# EAGLE board SCREW (EAGLE 7.6.0)
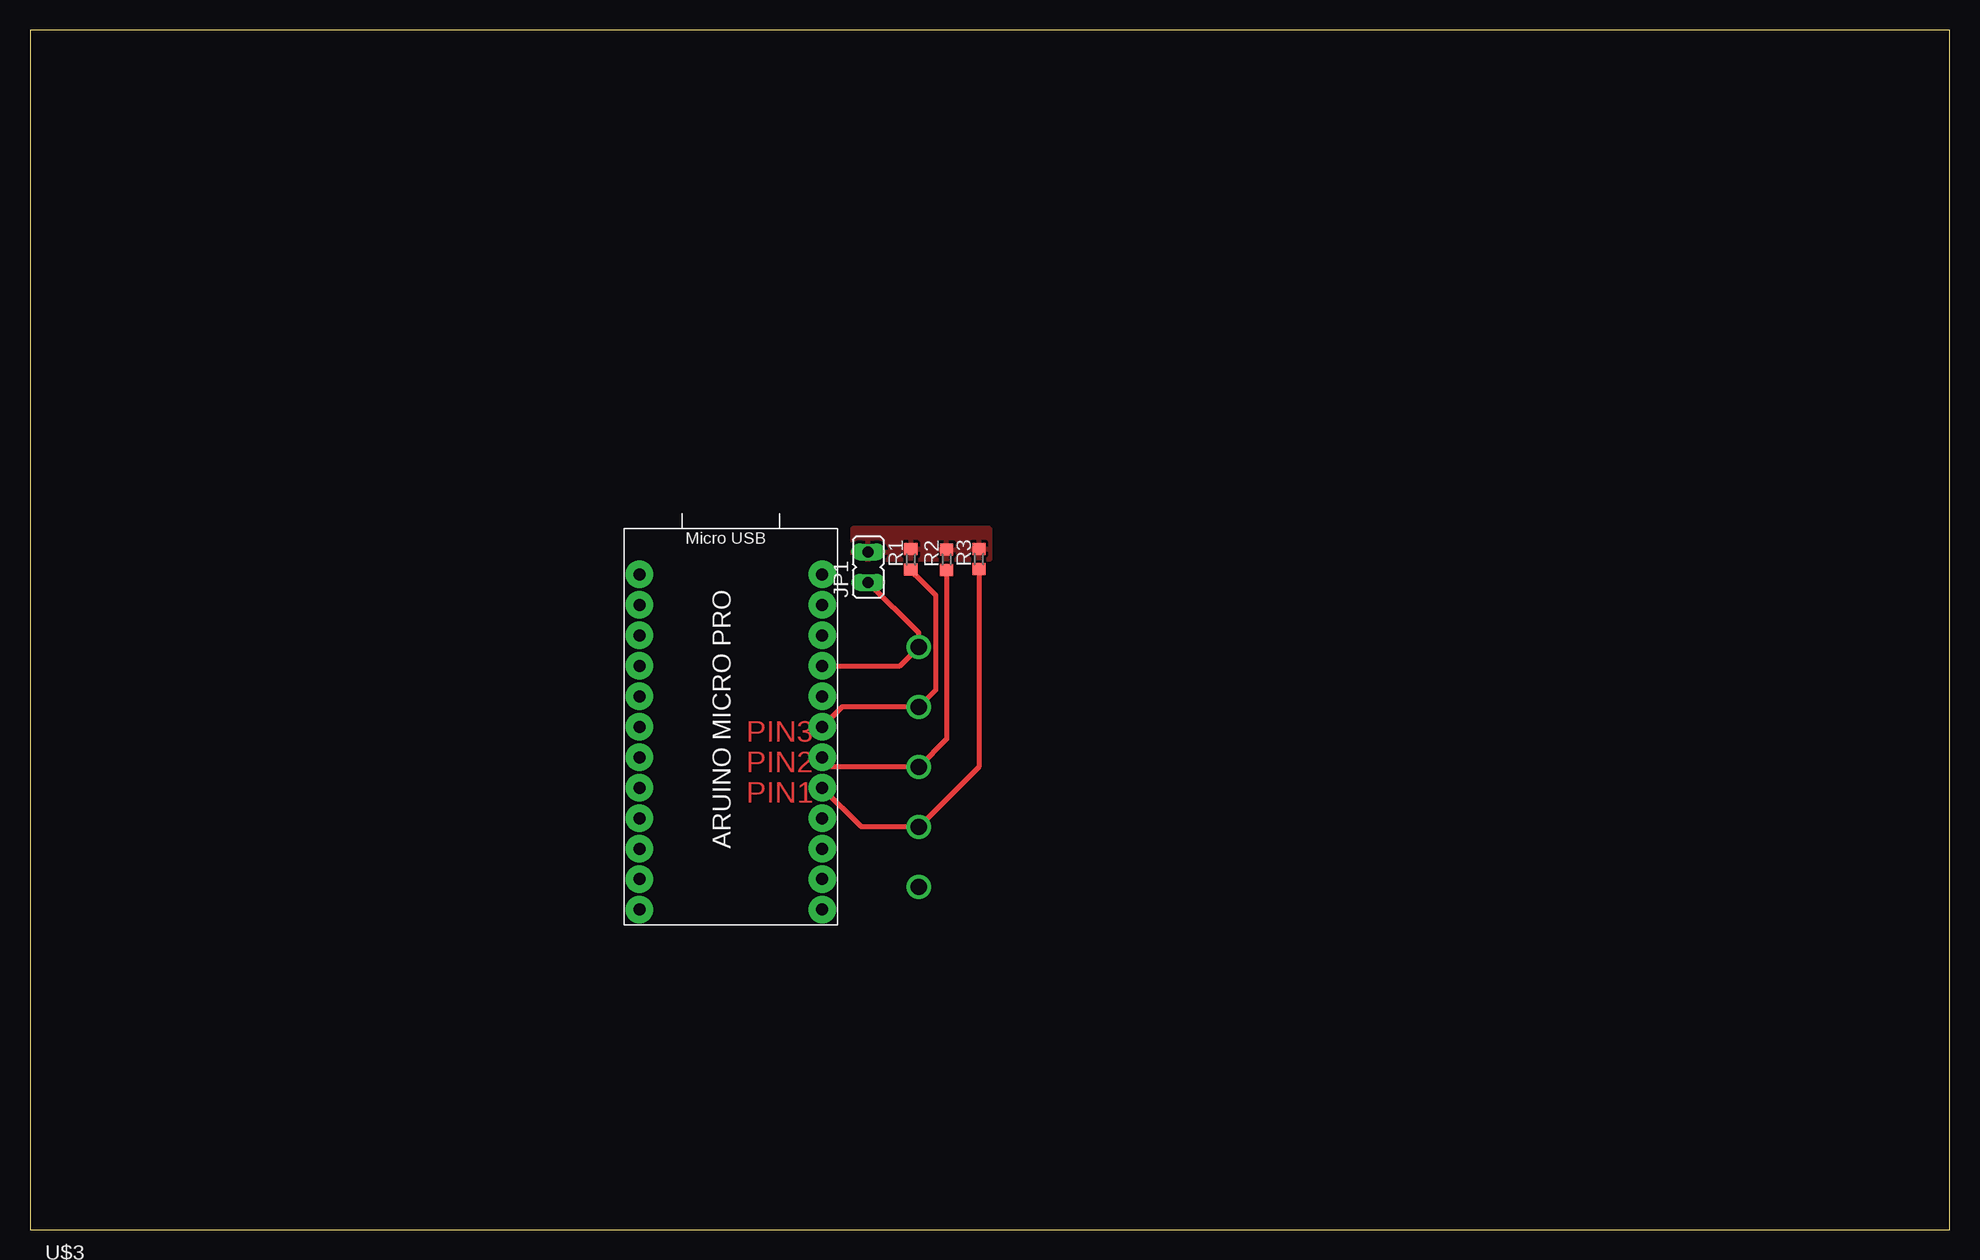
[diagram p0: board, top side]
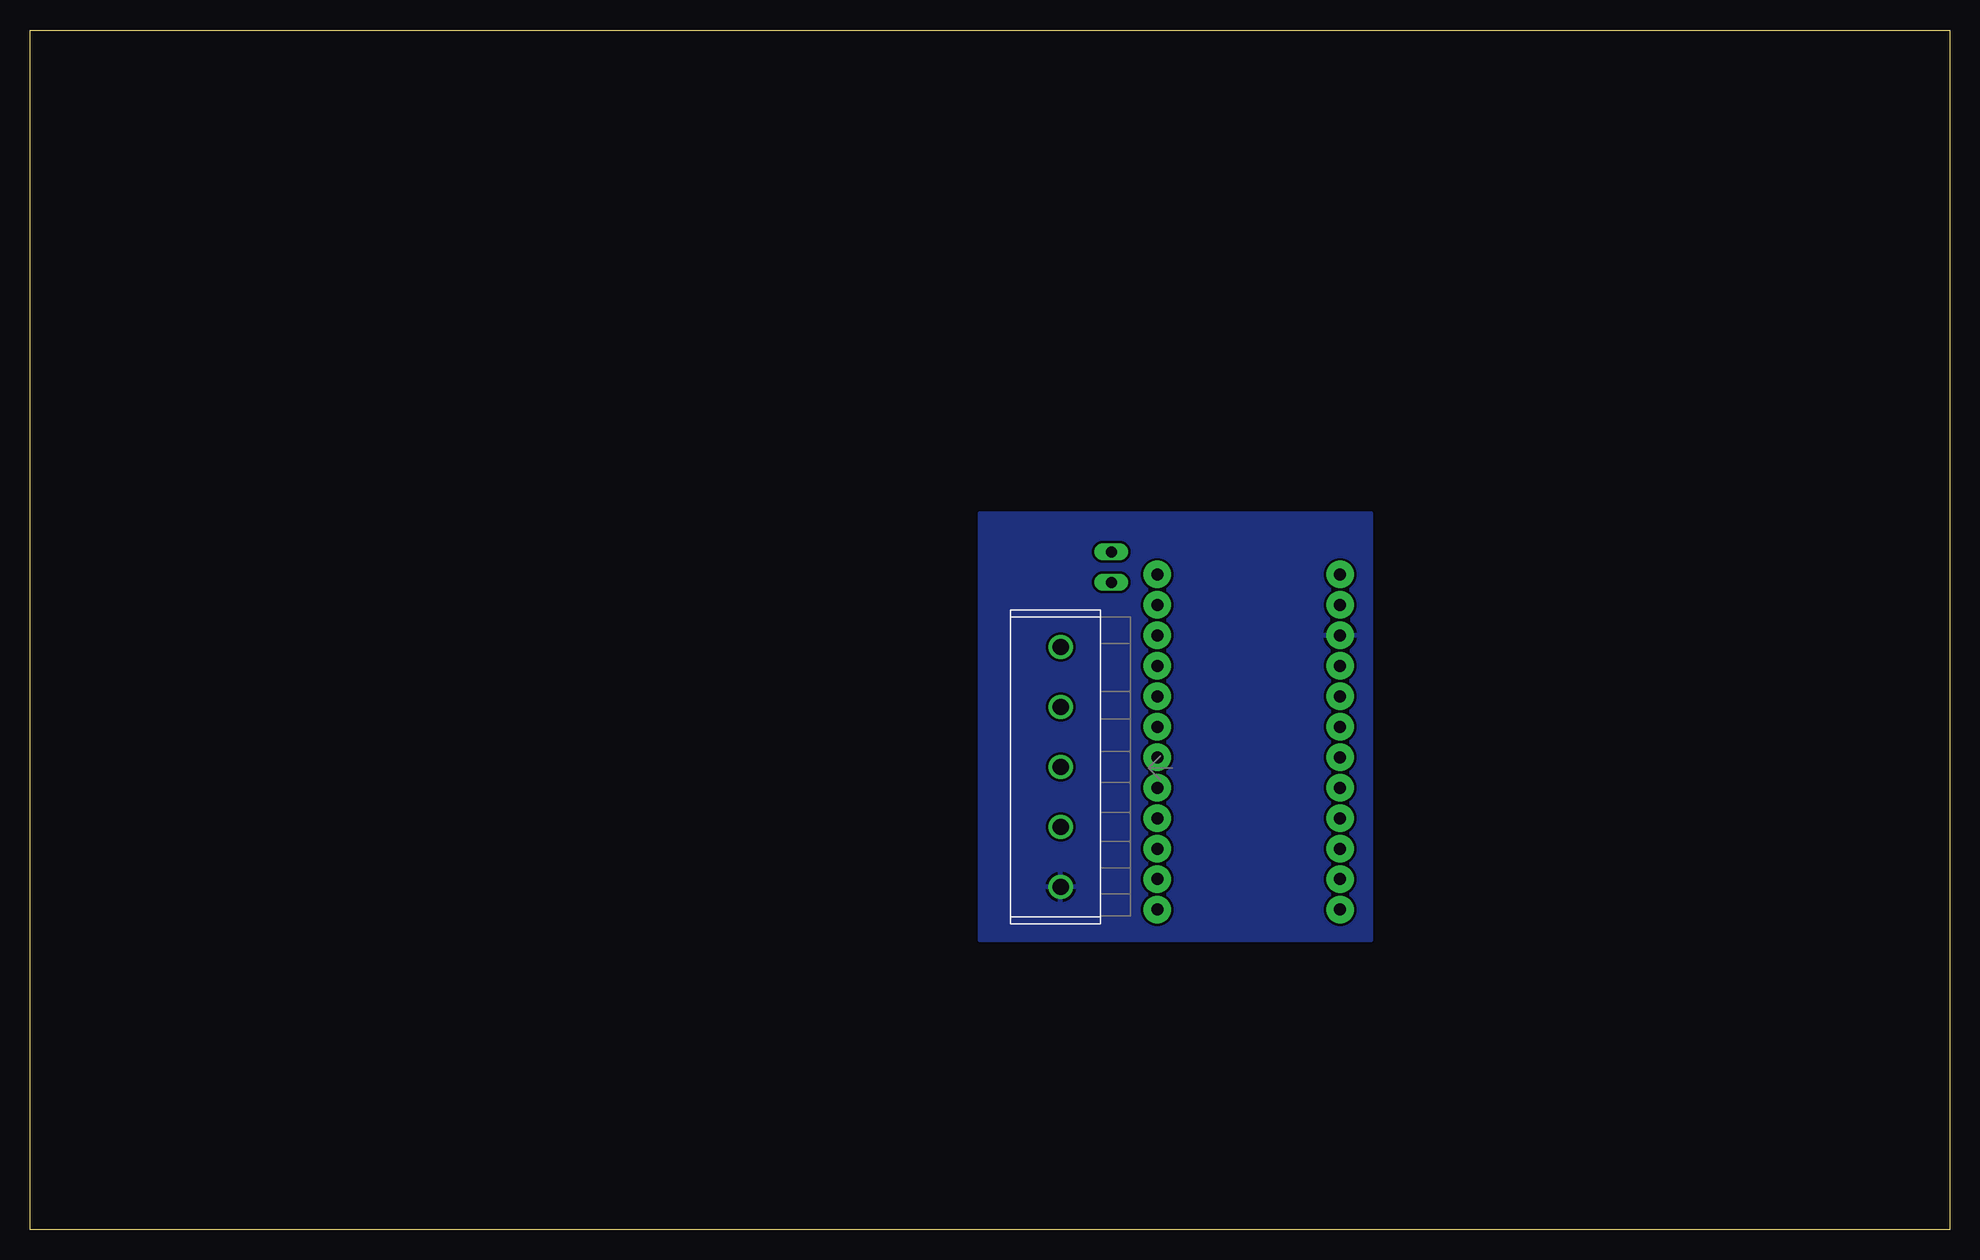
[diagram p1: board, bottom side, seen from below]

Size 160 x 100 mm. Coordinates in mm from the lower left corner, seen from the top.
Outline: 0,0 160,0 160,100 0,100 0,0
Copper layers (1*16): Top 0.035mm / dielectric 1.5mm / Bottom 0.035mm
Design rules "default": minimum track width 10mil, minimum drill 24mil, track to track 8mil, track to pad 8mil, pad to pad 8mil, via to via 8mil, smd to smd 8mil, copper to edge 40mil, drill to drill 8mil, minimum pad ring 10mil, minimum via ring 8mil, stop-mask expansion 4mil, vias tented up to drill 0mil, thermal gap 10mil

## Footprints (pad centres in the part's own frame; a part is rotated, then mirrored left to right if it is on the bottom)
JP1 = drill 0.914 long: 1 0,-1.27; 2 0,1.27
R0603 = smd 1 x 1.1: 1 -0.85,0; 2 0.85,0
ARDUINO_PRO_MICRO = drill 1 pad 2.286: 2 1.27,19.05; 3 1.27,16.51; 4 1.27,13.97; 5 1.27,11.43; 6 1.27,8.89; 7 1.27,6.35; 8 1.27,3.81; 9 1.27,1.27; 10 16.51,1.27; 14 16.51,6.35; 15 16.51,8.89; 16 16.51,3.81; A0 16.51,11.43; A1 16.51,13.97; A2 16.51,16.51; A3 16.51,19.05; GND@0 1.27,24.13; GND@1 1.27,21.59; GND@2 16.51,26.67; RAW 16.51,29.21; RST 16.51,24.13; RXI 1.27,26.67; TXO 1.27,29.21; VCC 16.51,21.59
5PIN_SCREW = drill 1.35: P$1 3.1,3.3; P$2 8.1,3.3; P$3 13.1,3.3; P$4 18.1,3.3; P$5 23.1,3.3
POGO_PIN_394 = drill 1.016 pad 1.524: POGO_PIN 0,0

## Placement (x,y rotation side)
JP1  [JP1]  69.87,55.22 0 top
R1  [R0603]  73.42,55.87 90 top
R2  [R0603]  76.4,55.85 90 top
R3  [R0603]  79.09,55.9 90 top
U$1  ARDUINO_PRO_MICRO  [ARDUINO_PRO_MICRO]  49.53,25.4 0 top
U$2  5PIN_SCREW  [5PIN_SCREW]  70.78,25.46 90 bottom
U$3  [POGO_PIN_394]  2.54,-3.81 0 top  (outside the outline)

## Library data of the parts
JP1 = jumper
R1-R3 = resistor
U$1 U$2 = pie
U$3 = pie; PIE-INT-REF-NUM: POGO-PIN

## Nets
5V: JP1.2 R1.2 R2.2 R3.2
GND: U$1.GND@0 U$2.P$1
PIN1: R3.1 U$1.A0 U$2.P$2
PIN2: R2.1 U$1.A1 U$2.P$3
PIN3: R1.1 U$1.A2 U$2.P$4
VCC: JP1.1 U$1.VCC U$2.P$5

## Tracks (layer width: path | path; a pad name or v marks a point on that pad's centre or on a via)
5V
  pour Top: 68.58,55.88 80.01,55.88 80.01,58.42 68.58,58.42
GND
  pour Bottom: 48.26,59.69 48.26,24.13 80.77,24.13 80.77,59.69
PIN1
  Top 0.406: U$1.A0 69.31,33.56 U$2.P$2 79.09,38.57 R3.1
PIN2
  Top 0.406: U$1.A1 66.85,38.56 U$2.P$3 76.4,40.88 R2.1
PIN3
  Top 0.406: U$1.A2 67.69,43.56 U$2.P$4 75.49,44.97 75.49,52.9 73.78,54.61 73.66,54.61 73.66,54.78 R1.1
VCC
  Top 0.406: U$1.VCC 72.51,46.99 U$2.P$5 74.08,49.74 JP1.1

## Text on the board
Top: PIN3 | PIN2 | PIN1